# Altium PCB PCB1.PcbDoc
Units mm, origin at the board's own origin, x right, y up, seen from the top; angles counter-clockwise.
Board outline 152.4 x 101.6 mm, 2 copper layers (Top Layer, Bottom Layer); 104 components, 87 nets, 414 pads, 25 vias.
Unrouted connection lines stored in the file: 283.
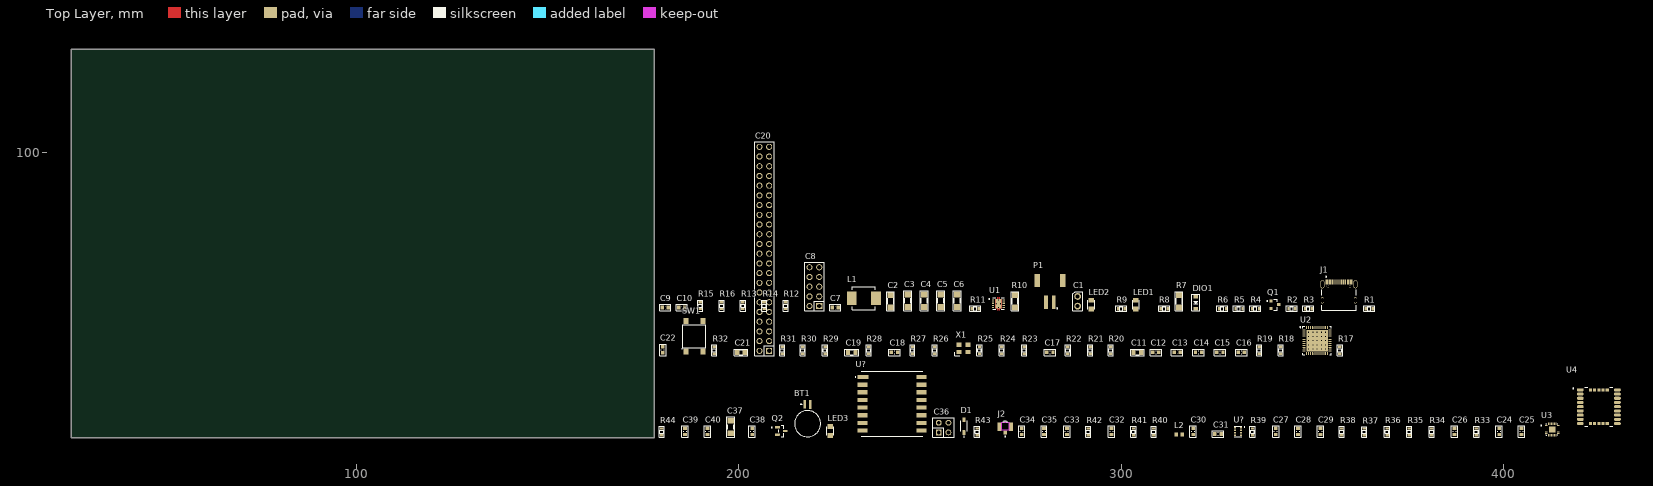
[diagram p0: Top Layer view]
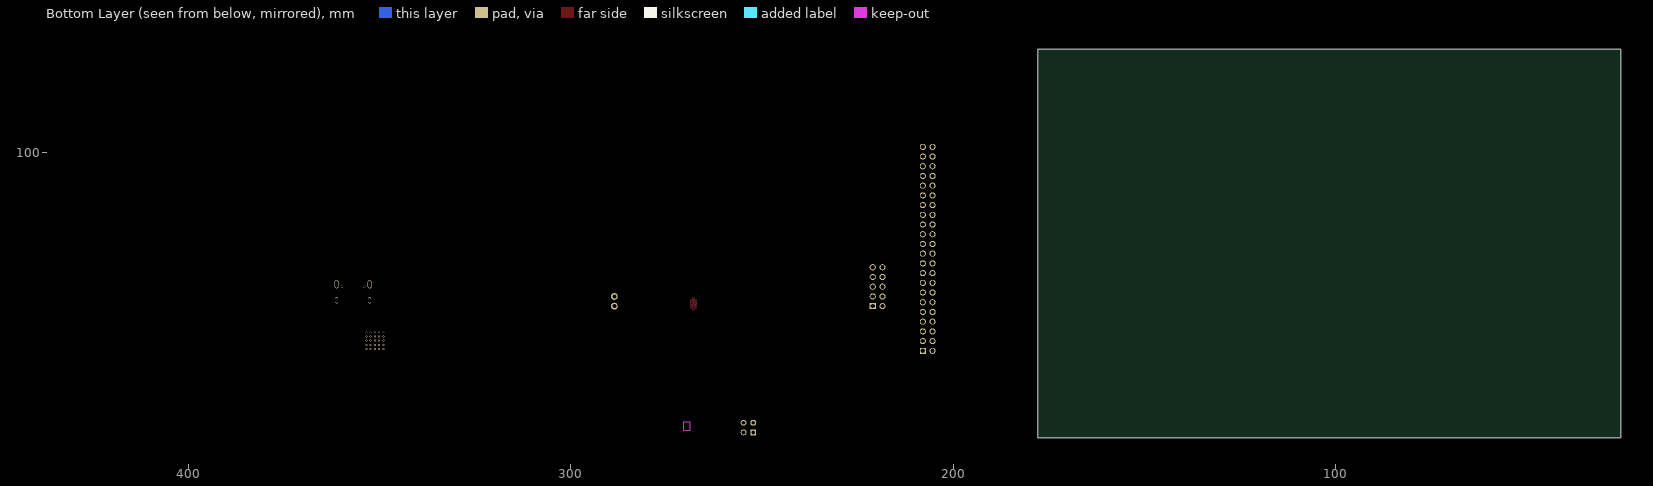
[diagram p1: Bottom Layer view, seen from below]

## Layer stack, top to bottom
Top Solder: solder mask 0.0102, Solder Resist, Dk 3.5
Top Layer: signal copper 0.0356
Dielectric 1: dielectric 0.32, FR-4, Dk 4.8
Bottom Layer: signal copper 0.0356
Bottom Solder: solder mask 0.0102, Solder Resist, Dk 3.5

## Board outline
25.4,25.4 177.8,25.4 177.8,127 25.4,127

## Design rules (kind name [scope] priority, off if disabled: settings)
Clearance [All] p1: gap=0.254 ignorepadtopadclearanceinfootprint=FALSE
PolygonConnect [All] p1: connectstyle=Relief reliefconductorwidth=0.254 reliefentries=4 polygonreliefangle="90 Angle" airgapwidth=0.254
RoutingVias [All] p1: holewidth=0.711 width=1.27 viastyle="Through Hole" minholewidth=0.711 minwidth=1.27 maxholewidth=0.711 maxwidth=1.27
SolderMaskExpansion [All] p1: expansion=0 istentingtop=FALSE
SupplyNets "Schematic Supply Nets_5" [InNet('VBUS')] p1: voltage=0.000
SupplyNets "Schematic Supply Nets_4" [InNet('GND_OUT')] p2: voltage=0.000
SupplyNets "Schematic Supply Nets_3" [InNet('GPS_VBAT')] p3: voltage=0.000
SupplyNets "Schematic Supply Nets_2" [InNet('VBAT')] p4: voltage=0.000
SupplyNets "Schematic Supply Nets_1" [InNet('V_PWR')] p5: voltage=0.000
SupplyNets "Schematic Supply Nets" [InNet('3.3V_OUT')] p6: voltage=0.000
Width [All] p1: maxlimit=0.254 minlimit=0.254 preferedwidth=0.254
30 further rules are at their usual default settings.

## Components (designator, comment, footprint, x,y, rotation, side; value= is the part's Value field where it differs from the comment)
BT1 "MS621FE-FL11E" BAT_MS621FE-FL11E 217.932,29.083 r90 top
C1 "JP2" JP2-CLOSED 288.544,62.357 r0 top
C2 "Pad" PAD-SMD-1206 239.649,61.087 r90 top value=33pF
C3 "100uF" CN-SMD-1206 244.094,61.214 r90 top value=33pF
C4 "10uF" CN-SMD-1206 248.412,61.214 r90 top value=33pF
C5 "10uF" CN-SMD-1206 252.73,61.214 r90 top value=33pF
C6 "10uF" CN-SMD-1206 257.048,61.214 r90 top value=33pF
C7 "100nF" CN-SMD-0603 225.171,59.436 r0 top value=33pF
C8 "JP5x2" JP5-D2T 219.71,64.897 r90 top
C9 "100nF" CN-SMD-0603 180.721,59.436 r0 top value=33pF
C10 "100nF" CN-SMD-0603 185.039,59.436 r0 top value=33pF
C11 "2.2uF" CN-SMD-0805 304.165,47.752 r0 top value=33pF
C12 "100nF" CN-SMD-0603 308.991,47.752 r0 top value=33pF
C13 "100nF" CN-SMD-0603 314.579,47.752 r0 top value=33pF
C14 "100nF" CN-SMD-0603 320.167,47.752 r0 top value=33pF
C15 "100nF" CN-SMD-0603 325.755,47.752 r0 top value=33pF
C16 "100nF" CN-SMD-0603 331.343,47.752 r0 top value=33pF
C17 "15pF" CN-SMD-0603 281.305,47.752 r0 top value=33pF
C18 "15pF" CN-SMD-0603 240.665,47.752 r0 top value=33pF
C19 "2.2uF" CN-SMD-0805 229.489,47.752 r0 top value=33pF
C20 "JP22x2" JP22-D2T 206.629,74.803 r90 top
C21 "2.2uF" CN-SMD-0805 200.533,47.752 r0 top value=33pF
C22 "100nF" CN-SMD-0603 180.086,48.387 r90 top value=33pF
C24 "100nF" CN-SMD-0603 398.78,27.051 r90 top value=33pF
C25 "33nF" CN-SMD-0603 404.622,27.051 r90 top value=33pF
C26 "100nF" CN-SMD-0603 387.096,27.051 r90 top value=33pF
C27 "100nF" CN-SMD-0603 340.36,27.051 r90 top value=33pF
C28 "10nF" CN-SMD-0603 346.202,27.051 r90 top value=33pF
C29 "10nF" CN-SMD-0603 352.044,27.051 r90 top value=33pF
C30 "100pF" CN-SMD-0603 318.77,27.051 r90 top value=33pF
C31 "10nF" CN-SMD-0603 325.247,26.416 r0 top value=33pF
C32 "100pF" CN-SMD-0603 297.434,27.051 r90 top value=33pF
C33 "100nF" CN-SMD-0603 285.75,27.051 r90 top value=33pF
C34 "PAD" PAD-CAP-SMD-0603 273.939,27.051 r90 top value=33pF
C35 "PAD" PAD-CAP-SMD-0603 279.781,27.051 r90 top value=33pF
C36 "JP2x2" JP2-C2T 253.492,28.067 r0 top
C37 "22uF" CN-SMD-1206 197.866,28.194 r90 top value=33pF
C38 "100nF" CN-SMD-0603 203.454,27.051 r90 top value=33pF
C39 "100nF" CN-SMD-0603 185.928,27.051 r90 top value=33pF
C40 "33nF" CN-SMD-0603 191.77,27.051 r90 top value=33pF
D1 "1N4148W-7" SOD3715X135N 258.826,28.448 r90 top
DIO1 "Diode SMD" DIO-SMD-123 319.405,60.706 r90 top value=1N5007
J1 "CQ-USB-C16PSMT01" SHENZHEN-CHUANGQIN-TECHNOLOGY_CQ-USB-C16PSMT01 356.87,66.167 r0 top
J2 "IPEX" IPEX_20279-001E-03 269.621,28.321 r0 top
L1 "2.2uH" INDC6060X300 232.664,61.849 r0 top
L2 "68nH" SMD_Inductor_0603 315.087,26.289 r0 top
LED1 "LED GREEN" LED-0805-Green 303.784,59.055 r90 top value="LED 3 - 5 ly 2 Colour"
LED2 "LED GREEN" LED-0805-Blue 292.1,59.055 r90 top value="LED 3 - 5 ly 2 Colour"
LED3 "LED" LED-0805-Green 223.901,26.035 r90 top value="LED 3 - 5 ly 2 Colour"
P1 "S2B-PH-SM4-TB" JST_S2B-PH-SM4-TB 281.305,60.833 r0 top
Q1 "P_MOSFET" P_MOSFET_SOT23 340.106,60.198 r0 top
Q2 "N_MOSFET" SOT-23-3 211.074,27.178 r0 top
R1 "5.1K" RES-SMD-0603 364.744,59.182 r0 top
R2 "5.1K" RES-SMD-0603 344.551,59.182 r0 top
R3 "22R" RES-SMD-0603 348.869,59.182 r0 top
R4 "10K" RES-SMD-0603 335.026,59.182 r0 top
R5 "22R" RES-SMD-0603 330.708,59.182 r0 top
R6 "22R" RES-SMD-0603 326.39,59.182 r0 top
R7 "Pad" PAD-SMD-1206 315.087,61.087 r90 top
R8 "1.5K" RES-SMD-0603 311.15,59.182 r0 top
R9 "2K" RES-SMD-0603 299.974,59.182 r0 top
R10 "Pad" PAD-SMD-1206 272.161,61.087 r90 top
R11 "100R" RES-SMD-0603 261.747,59.182 r0 top
R12 "5.1K" RES-SMD-0603 212.217,59.944 r90 top
R13 "80K" RES-SMD-0603 201.041,59.944 r90 top
R14 "66K" RES-SMD-0603 206.629,59.944 r90 top
R15 "200K" RES-SMD-0603 189.865,59.944 r90 top
R16 "200K" RES-SMD-0603 195.453,59.944 r90 top
R17 "0R" RES-SMD-0603 357.124,48.26 r90 top
R18 "0R" RES-SMD-0603 341.63,48.26 r90 top
R19 "0R" RES-SMD-0603 336.042,48.26 r90 top
R20 "0R" RES-SMD-0603 297.18,48.26 r90 top
R21 "0R" RES-SMD-0603 291.846,48.26 r90 top
R22 "0R" RES-SMD-0603 286.004,48.26 r90 top
R23 "0R" RES-SMD-0603 274.574,48.26 r90 top
R24 "10K" RES-SMD-0603 268.732,48.26 r90 top
R25 "0R" RES-SMD-0603 262.89,48.26 r90 top
R26 "0R" RES-SMD-0603 251.206,48.26 r90 top
R27 "PAD" PAD-RES-SMD-0603 245.364,48.26 r90 top
R28 "10K" RES-SMD-0603 233.934,48.26 r90 top
R29 "0R" RES-SMD-0603 222.504,48.26 r90 top
R30 "PAD" PAD-RES-SMD-0603 216.662,48.26 r90 top
R31 "PAD" PAD-RES-SMD-0603 211.328,48.26 r90 top
R32 "10K" RES-SMD-0603 193.548,48.26 r90 top
R33 "10K" RES-SMD-0603 392.811,26.924 r90 top
R34 "10K" RES-SMD-0603 381.127,26.924 r90 top
R35 "10K" RES-SMD-0603 375.285,26.924 r90 top
R36 "4.7K" RES-SMD-0603 369.443,26.924 r90 top
R37 "PAD" PAD-RES-SMD-0603 363.474,26.924 r90 top
R38 "4.7K" RES-SMD-0603 357.632,26.924 r90 top
R39 "10K" RES-SMD-0603 334.264,26.924 r90 top
R40 "10R" RES-SMD-0603 308.483,26.924 r90 top
R41 "10K" RES-SMD-0603 303.149,26.924 r90 top
R42 "0R" RES-SMD-0603 291.338,26.924 r90 top
R43 "1K" RES-SMD-0603 262.255,26.924 r90 top
R44 "1K" RES-SMD-0603 179.832,26.924 r90 top
SW1 "SW" SW2-SMD 188.341,51.943 r90 top value="Button chip 4 pin"
U1 "TPS63001DRCR" VREG_V62/16624-01YE 267.843,60.452 r0 top
U2 "STM32F411CEU6" STM-UFQFPN48_L 351.155,50.8 r0 top
U3 "MPU-9250" QFN40P300X300X105-25N 412.623,27.559 r0 top
U4 "LC76G" XCVR_LC76G 424.815,33.528 r0 top
U? "RA-02_LORA" MODULE_RA-02_LORA 240.03,34.29 r0 top
U? "BMP280" XDCR_BMP280 330.454,27.051 r0 top
X1 "XTAL_3225_25MHZ" XTAL_3225 258.699,48.768 r0 top

## Footprints (in the part's own frame and the unit in brackets; to place one, negate y for a bottom-side part, rotate by r counter-clockwise, add the part's x,y. Pads: shape width x height; smd on the part's side, far side on the other; paste and mask are expansions set on the pad)
BAT_MS621FE-FL11E [mm]
  rect 2.3x0.65 smd: NEG(5,-0.75)
  rect 2.2x0.65 smd: POS(5.05,0.75)
  silkscreen extent -3.4,-3.4 5.3,3.4, body extent -3.4,-3.4 5.9,3.4, height 2.8
CN-SMD-0603 [mm]
  rect 0.9x1 smd: 1(-0.8,0) 2(0.8,0)
  silkscreen extent -1.5,-0.85 1.5,0.85, body extent -0.8,-0.4 0.8,0.4, height 0.3
CN-SMD-0805 [mm]
  rect 1.1x1.397 smd: 1(-1,0) 2(1,0)
  silkscreen extent -1.78,-0.86 1.78,0.84, body extent -1,-0.62 1,0.63, height 0.8
CN-SMD-1206 [mil]
  rect 60x65 smd: 1(-64,0) 2(66,0)
  silkscreen extent -103,-42 105,42, body extent -63,-31 63,32, height 40
DIO-SMD-123 [mm]
  rect 0.9x1.2 smd: 1(1.524,0) 2(-1.524,0)
  silkscreen extent -2.16,-1.02 2.16,1.02, body extent -1.76,-0.8 1.94,0.8, height 1.25
INDC6060X300 [mm]
  rect 2.6x3.5 smd: 1(-3.175,0) 2(3.175,0)
  silkscreen extent -3,-3 3,3, body extent -3.55,-3 3.55,3, height 3
IPEX_20279-001E-03 [mm]
  rect 1x1.05 smd: 1(0,-1.525)
  rect 1.05x2.2 smd: 2(1.475,0) 3(-1.475,0)
  Keep-Out Layer region: 0.95,-1 -0.95,-1 -0.95,1.1 0.95,1.1
  silkscreen extent -0.7,-2.71 0.7,1.55, body extent -1.5,-1.55 1.5,1.55, height 1.25
JP2-C2T [mm] "4 pins, dual row, straight, gold plating"
  rect 1.52x1.52 hole 1.02: 1(-1.27,-1.27)
  round 1.52 hole 1.02: 2(1.27,-1.27) 3(1.27,1.27) 4(-1.27,1.27)
  silkscreen extent -2.79,-2.54 2.79,2.54, body extent -2.79,-2.54 2.79,2.54, height 8.51
JP2-CLOSED [mil]
  round 70 hole 40: 1(0,0) 2(0,-100)
  silkscreen extent -50,-150 50,50, body extent -50,-152 50,50, height 300
JP5-D2T [mm] "10 pins, dual pin, straight, gold plating"
  rect 1.6x1.6 hole 1.1: 1(-5.08,-1.27)
  round 1.6 hole 1.1: 2(-2.54,-1.27) 3(0,-1.27) 4(2.54,-1.27) 5(5.08,-1.27) 6(5.08,1.27) 7(2.54,1.27) 8(0,1.27) 9(-2.54,1.27) 10(-5.08,1.27)
  silkscreen extent -6.35,-2.54 6.35,2.54, body extent -6.35,-2.54 6.35,2.54, height 8.55
JP22-D2T [mm] "44 pins, dual pin, straight, gold plating"
  rect 1.6x1.6 hole 1.1: 1(-26.67,-1.27)
  round 1.6 hole 1.1: 2(-24.13,-1.27) 3(-21.59,-1.27) 4(-19.05,-1.27) 5(-16.51,-1.27) 6(-13.97,-1.27) 7(-11.43,-1.27) 8(-8.89,-1.27) 9(-6.35,-1.27) 10(-3.81,-1.27) 11(-1.27,-1.27) 12(1.27,-1.27) 13(3.81,-1.27) 14(6.35,-1.27) 15(8.89,-1.27) 16(11.43,-1.27) 17(13.97,-1.27) 18(16.51,-1.27) 19(19.05,-1.27) 20(21.59,-1.27) 21(24.13,-1.27) 22(26.67,-1.27) 23(26.67,1.27) 24(24.13,1.27) 25(21.59,1.27) 26(19.05,1.27) 27(16.51,1.27) 28(13.97,1.27) 29(11.43,1.27) 30(8.89,1.27) 31(6.35,1.27) 32(3.81,1.27) 33(1.27,1.27) 34(-1.27,1.27) 35(-3.81,1.27) 36(-6.35,1.27) 37(-8.89,1.27) 38(-11.43,1.27) 39(-13.97,1.27) 40(-16.51,1.27) 41(-19.05,1.27) 42(-21.59,1.27) 43(-24.13,1.27) 44(-26.67,1.27)
  silkscreen extent -27.94,-2.54 27.94,2.54, body extent -27.94,-2.54 27.94,2.54, height 8.55
JST_S2B-PH-SM4-TB [mm]
  rect 1x3.5 smd: 1(1,0) 2(-1,0)
  rect 1.5x3.4 smd: P1(3.35,5.75) P2(-3.35,5.75)
  silkscreen extent 1.77,-1.73 2.03,-1.47, body extent -3.96,-1.38 3.94,7.22, height 5.5
LED-0805-Blue [mil]
  rect 50x55 smd: 1(0,0) 2(90,0)
  silkscreen extent 0,-35 90,35, body extent 5,-25 85,25, height 43
LED-0805-Green [mil]
  rect 50x55 smd: 1(0,0) 2(90,0)
  silkscreen extent 0,-35 90,35, body extent 5,-25 85,25, height 43
MODULE_RA-02_LORA [mm]
  rect 2.8x1.1 smd: 1(-7.6,7)
  rect 2.6x1.1 smd: 2(-7.7,5) 3(-7.7,3) 4(-7.7,1) 5(-7.7,-1) 6(-7.7,-3) 7(-7.7,-5) 8(-7.7,-7) 9(7.7,-7) 10(7.7,-5) 11(7.7,-3) 12(7.7,-1) 13(7.7,1) 14(7.7,3) 15(7.7,5) 16(7.7,7)
  silkscreen extent -9.68,-8.5 8,8.5, body extent -8,-8.5 8,8.5, height 3.3
P_MOSFET_SOT23 [mm]
  rect 0.9x0.8 smd: 1(-1,0.95) 2(-1,-0.95) 3(1,0)
  silkscreen extent -2.1,-1.45 0.65,1.45, body extent -1.2,-1.45 1.2,1.45, height 1.2
PAD-CAP-SMD-0603 [mm]
  rect 0.9x1 smd: 1(-0.8,0) 2(0.8,0)
  silkscreen extent -1.5,-0.75 1.5,0.75
PAD-RES-SMD-0603 [mm]
  rect 0.6x0.9 smd: 1(-0.889,0) 2(0.927,0)
  silkscreen extent -1.4,-0.64 1.4,0.64
PAD-SMD-1206 [mil]
  rect 60x65 smd: 1(-64,0) 2(66,0)
  silkscreen extent -98,-38 100,39
QFN40P300X300X105-25N [mm]
  rrect25% 0.64x0.22 smd: 1(-1.545,1) 2(-1.545,0.6) 3(-1.545,0.2) 4(-1.545,-0.2) 5(-1.545,-0.6) 6(-1.545,-1) 13(1.545,-1) 14(1.545,-0.6) 15(1.545,-0.2) 16(1.545,0.2) 17(1.545,0.6) 18(1.545,1)
  rrect25% 0.22x0.64 smd: 7(-1,-1.545) 8(-0.6,-1.545) 9(-0.2,-1.545) 10(0.2,-1.545) 11(0.6,-1.545) 12(1,-1.545) 19(1,1.545) 20(0.6,1.545) 21(0.2,1.545) 22(-0.2,1.545) 23(-0.6,1.545) 24(-1,1.545)
  rect 1.7x1.54 smd paste-2: 25(0,0)
  silkscreen extent -2.96,-1.5 1.5,1.5, body extent -1.5,-1.5 1.5,1.5, height 1.05
RES-SMD-0603 [mm]
  rect 0.6x0.9 smd: 1(-0.889,0) 2(0.927,0)
  silkscreen extent -1.43,-0.68 1.45,0.67, body extent -0.8,-0.4 0.8,0.4, height 0.43
SHENZHEN-CHUANGQIN-TECHNOLOGY_CQ-USB-C16PSMT01 [mm]
  rect 0.6x1.3 smd: A1_B12(-3.2,0) A4_B9(-2.4,0) B1_A12(3.2,0) B4_A9(2.4,0)
  rect 0.3x1.3 smd: A5(-1.25,0) A6(-0.25,0) A7(0.25,0) A8(1.25,0) B5(1.75,0) B6(0.75,0) B7(-0.75,0) B8(-1.75,0)
  oval 1.05x2.1 hole 0.6 slot 1.7 at 90 deg: S1(-4.32,-0.64) S2(4.32,-0.64)
  oval 0.8x1.6 hole 0.6 slot 1.2 at 90 deg: S3(-4.32,-4.82) S4(4.32,-4.82)
  round 0.65 hole 0.65 unplated: ""(-2.89,-1.14) ""(2.89,-1.14)
  silkscreen extent -4.47,-7.42 4.47,1.45, body extent -4.47,-7.33 4.47,0.48, height 3.26
SMD_Inductor_0603 [mm]
  rect 0.94x1.11 smd: 1(-0.789,0) 2(0.789,0)
  body extent -0.8,-0.4 0.8,0.4, height 1
SOD3715X135N [mm]
  rrect18% 1.21x0.73 smd: A(1.68,0) C(-1.68,0)
  silkscreen extent -2.9,-0.85 1.35,0.85, body extent -1.83,-0.77 1.83,0.77, height 0.74
SOT-23-3 [mm]
  rrect25% 1.3x0.6 smd: 1(-1.025,0.95) 2(-1.025,-0.95) 3(1.025,0)
  silkscreen extent -2.6,-1.46 0.65,1.46, body extent -1.18,-1.46 1.18,1.46, height 1.12
STM-UFQFPN48_L [mm] "QFN, 48-Leads, Body 7.1x7.1mm, Pitch 0.5mm, Thermal Pad 5.6x5.6mm, IPC High Density"
  oval 0.8x0.25 smd: 1(-3.4,2.75) 2(-3.4,2.25) 3(-3.4,1.75) 4(-3.4,1.25) 5(-3.4,0.75) 6(-3.4,0.25) 7(-3.4,-0.25) 8(-3.4,-0.75) 9(-3.4,-1.25) 10(-3.4,-1.75) 11(-3.4,-2.25) 12(-3.4,-2.75) 25(3.4,-2.75) 26(3.4,-2.25) 27(3.4,-1.75) 28(3.4,-1.25) 29(3.4,-0.75) 30(3.4,-0.25) 31(3.4,0.25) 32(3.4,0.75) 33(3.4,1.25) 34(3.4,1.75) 35(3.4,2.25) 36(3.4,2.75)
  oval 0.25x0.8 smd: 13(-2.75,-3.4) 14(-2.25,-3.4) 15(-1.75,-3.4) 16(-1.25,-3.4) 17(-0.75,-3.4) 18(-0.25,-3.4) 19(0.25,-3.4) 20(0.75,-3.4) 21(1.25,-3.4) 22(1.75,-3.4) 23(2.25,-3.4) 24(2.75,-3.4) 37(2.75,3.4) 38(2.25,3.4) 39(1.75,3.4) 40(1.25,3.4) 41(0.75,3.4) 42(0.25,3.4) 43(-0.25,3.4) 44(-0.75,3.4) 45(-1.25,3.4) 46(-1.75,3.4) 47(-2.25,3.4) 48(-2.75,3.4)
  rect 5.6x5.6 smd: 49(0,0)
  silkscreen extent -4.47,-3.7 3.7,3.7, body extent -3.55,-3.55 3.55,3.55, height 0.6
SW2-SMD [mm] "6*6mm vertical type, SMD, height 5.0mm, black actuator, 160gf, T&R"
  rect 1.55x1.3 smd: 1(-3.975,2.25) 2(-3.975,-2.25) 3(3.975,-2.25) 4(3.975,2.25)
  silkscreen extent -3.29,-3.04 3.04,3.29, body extent -4.5,-3.1 4.5,3.1, height 4.99
VREG_V62/16624-01YE [mm]
  rrect25% 0.6x0.24 smd mask+0: 1(-1.4,1) 2(-1.4,0.5) 3(-1.4,0) 4(-1.4,-0.5) 5(-1.4,-1) 6(1.4,-1) 7(1.4,-0.5) 8(1.4,0) 9(1.4,0.5) 10(1.4,1)
  rrect5% 1.65x2.4 smd paste-2 mask+0: 11(0,0)
  round 0.3 hole 0.2 mask+0: 12(0,-0.95) 13(-0.575,0) 14(0.575,0) 15(0,0.95)
  Top Layer region: 0.375,1.2 0.825,1.2 0.825,-1.2 0.375,-1.2 0.375,-1.7 0.125,-1.7 0.125,-1.2 -0.125,-1.2 -0.125,-1.7 -0.375,-1.7 -0.375,-1.2 -0.825,-1.2 -0.825,1.2 -0.375,1.2 -0.375,1.7 -0.125,1.7 -0.125,1.2 0.125,1.2 0.125,1.7 0.375,1.7
  silkscreen extent -2.49,-1.5 1.5,1.5, body extent -1.5,-1.5 1.5,1.5, height 1
XCVR_LC76G [mm]
  oval 1.8x0.8 smd: 1(-4.85,4.4) 2(-4.85,3.3) 3(-4.85,2.2) 4(-4.85,1.1) 5(-4.85,0) 6(-4.85,-1.1) 7(-4.85,-2.2) 8(-4.85,-3.3) 9(-4.85,-4.4) 10(4.85,-4.4) 11(4.85,-3.3) 12(4.85,-2.2) 13(4.85,-1.1) 14(4.85,0) 15(4.85,1.1) 16(4.85,2.2) 17(4.85,3.3) 18(4.85,4.4)
  rect 0.8x0.8 smd: 19(2.2,4.4) 20(1.1,4.4) 21(0,4.4) 22(-1.1,4.4) 23(-2.2,4.4) 24(-2.2,-4.4) 25(-1.1,-4.4) 26(0,-4.4) 27(1.1,-4.4) 28(2.2,-4.4)
  silkscreen extent -6.8,-5.05 3.63,5.05, body extent -4.85,-5.05 4.85,5.05, height 2.65
XDCR_BMP280 [mm]
  rect 0.5x0.35 smd: 1(0.8,0.975) 2(0.8,0.325) 3(0.8,-0.325) 4(0.8,-0.975) 5(-0.8,-0.975) 6(-0.8,-0.325) 7(-0.8,0.325) 8(-0.8,0.975)
  silkscreen extent -1,-1.35 1.8,1.35, body extent -1,-1.25 1,1.25, height 1
XTAL_3225 [mm]
  rrect10% 1.3x1.1 smd: 1(-1.15,-0.95) 2(1.15,-0.95) 3(1.15,0.95) 4(-1.15,0.95)
  silkscreen extent -2.23,-1.89 -1,-1, body extent -1.6,-1.28 1.6,1.22, height 0.61

## Part data
BT1: "Coin, 6.8mm 3 V Lithium Battery Rechargeable (Secondary) 5.5mAh", Package="QFP-128 Seiko", Availability="In Stock", Check_prices=https://www.snapeda.com/parts/MS621FE-FL11E/Seiko+Instruments/view-part/?ref=eda, MF="Seiko Instruments", MP=MS621FE-FL11E, Price=None, Purchase-URL=https://pricing.snapeda.com/search/part/MS621FE-FL11E/?ref=eda, SnapEDA_Link=https://www.snapeda.com/parts/MS621FE-FL11E/Seiko+Instruments/view-part/?ref=snap
C1: "WR-PHD 2.54 mm Angled Socket Header", Manufacturer="W¨¹rth Elektronik eiSos GmbH", partNo=613002143121, ComponentLink1 Description=Manufacturer, ComponentLink1URL=http://www.we-online.com, ComponentLink2 Description=Datasheet, ComponentLink2URL=http://katalog.we-online.de/em/datasheet/6130xx143121.pdf, Created by="Karrer Zheng", Created Date="29 March 2013", NoPins=02
C2 C3 C4 C5 C6 C7 C9 C10 C11 C12 C13 C14 C15 C16 C17 C18 C19 C21 C22 C24 C25 C26 C27 C28 C29 C30 C31 C32 C33 C34 C35 C37 C38 C39 C40: library part Cap-SMD
C8: "WR-PHD 2.54 mm Dual Socket Header", Manufacturer="W¨¹rth Elektronik eiSos GmbH", partNo=61301021821, ComponentLink1 Description=Manufacturer, ComponentLink1URL=http://www.we-online.com, ComponentLink2 Description=Datasheet, ComponentLink2URL=http://katalog.we-online.de/em/datasheet/6130xx21821.pdf, Created by="Karrer Zheng", Created Date="29 March 2013", NoPins=10
C20: "WR-PHD 2.54 mm Dual Socket Header", Manufacturer="W¨¹rth Elektronik eiSos GmbH", partNo=61304421821, ComponentLink1 Description=Manufacturer, ComponentLink1URL=http://www.we-online.com, ComponentLink2 Description=Datasheet, ComponentLink2URL=http://katalog.we-online.de/em/datasheet/6130xx21821.pdf, Created by="Karrer Zheng", Created Date="29 March 2013", NoPins=44
C36: "WR-PHD 2.54 mm Dual Socket Header", Manufacturer="W¨¹rth Elektronik eiSos GmbH", partNo=61300421821, ComponentLink1 Description=Manufacturer, ComponentLink1URL=http://www.we-online.com, ComponentLink2 Description=Datasheet, ComponentLink2URL=http://katalog.we-online.de/em/datasheet/6130xx21821.pdf, Created by="Karrer Zheng", Created Date="29 March 2013", NoPins=04
D1: "Diode Standard 100 V 300mA (DC) Surface Mount SOD-123", Package="SOD-123 Fairchild Semiconductor", Availability="In Stock", Check_prices=https://www.snapeda.com/parts/1N4148W-7/Diodes+Inc./view-part/?ref=eda, MF="Diodes Inc.", MP=1N4148W-7, Price=None, Purchase-URL=https://pricing.snapeda.com/search/part/1N4148W-7/?ref=eda, SnapEDA_Link=https://www.snapeda.com/parts/1N4148W-7/Diodes+Inc./view-part/?ref=snap
DIO1: "Default Diode", Code - JEDEC=DO-214-AB, Published=8-Jun-2000, Publisher="Altium Limited", Revision="July-2002: Re-released for DXP Platform."
J1: "C Type USB Type-C Female Plug 16 Pin Connector Power Charger Jack Port", Package=Package, Check_prices=https://www.snapeda.com/parts/CQ-USB-C16PSMT01/Shenzen+Chuangqin+Technology/view-part/?ref=eda, MF="Shenzen Chuangqin Technology", MP=CQ-USB-C16PSMT01, SnapEDA_Link=https://www.snapeda.com/parts/CQ-USB-C16PSMT01/Shenzen+Chuangqin+Technology/view-part/?ref=snap
J2: "1 POS Vertical SMD Small form factor with big performance through 6 GHz connector,MHF, RF, micro-coaxial MHF I Receptacle", Package=None, Check_prices=https://www.snapeda.com/parts/20279-001E-03/I-PEX/view-part/?ref=eda, MF=I-PEX, MP=20279-001E-03, SnapEDA_Link=https://www.snapeda.com/parts/20279-001E-03/I-PEX/view-part/?ref=snap
L1 L2: library part SMD-Wire-Inductor, "INDUCTOR wire-wound", Package=None, Availability=Unavailable, MP=LQW2BAN68NG00L, Price=None
LED1 LED2 LED3: library part "LED SMD"
P1: "Connector Header Surface Mount, Right Angle 2 position 0.079 (2.00mm)", Package=None, Check_prices=https://www.snapeda.com/parts/S2B-PH-SM4-TB/JST/view-part/?ref=eda, MF="JST Sales", MP=S2B-PH-SM4-TB, SnapEDA_Link=https://www.snapeda.com/parts/S2B-PH-SM4-TB/JST/view-part/?ref=snap
Q1: Package="SOT-23 Diotec", Check_prices=https://www.snapeda.com/parts/MMFTP3401/Diotec/view-part/?ref=eda, MF="Diotec Semiconductor", MP=MMFTP3401, SnapEDA_Link=https://www.snapeda.com/parts/MMFTP3401/Diotec/view-part/?ref=snap
Q2: Package="SOT-23-3 Vishay Siliconix", Check_prices=https://www.snapeda.com/parts/SI2306BDS-T1-GE3/Vishay/view-part/?ref=eda, MF="Vishay Siliconix", MP=SI2306BDS-T1-GE3, SnapEDA_Link=https://www.snapeda.com/parts/SI2306BDS-T1-GE3/Vishay/view-part/?ref=snap
R1 R2 R3 R4 R5 R6 R7 R8 R9 R10 R11 R12 R13 R14 R15 R16 R17 R18 R19 R20 R21 R22 R23 R24 R25 R26 R27 R28 R29 R30 R31 R32 R37 R40 R42 R43 R44: library part Res-SMD, "Resistor", Manufacturer="Generic Components", Class=Passive, Published=08/06/2000, Publisher="Altium Hobart Technology Centre"
R33 R34 R35 R36 R38 R39 R41: library part Res-SMD, Manufacturer="Generic Components", Class=Passive, Published=08/06/2000, Publisher="Altium Hobart Technology Centre"
SW1: library part SW4, "Switch button 4 pin"
U1: "96% Buck-Boost Converter with 1.7A Current Switches, 3.3V fixed Output voltage in 3x3 QFN", Package="VSON-10 Texas Instruments", Check_prices=https://www.snapeda.com/parts/TPS63001DRCR/Texas+Instruments/view-part/?ref=eda, MF="Texas Instruments", MP=TPS63001DRCR, SnapEDA_Link=https://www.snapeda.com/parts/TPS63001DRCR/Texas+Instruments/view-part/?ref=snap
U2: library part CMP-0243-00165-1, "ARM Cortex-M4 32-bit MCU+FPU, 512 KB Flash, 128 KB RAM, 36 I/Os, 48-Pin UFQFPN, -40 to 85 degC, Tray", I/Os (High Current)=36, Operating Frequency(F) (Processor speed) (MHz)=100, Package Description=UFQFPN48, Package Reference="48-Pin Ultra Thin Fine Pitch Quad Flat No-Lead, 7 x 7 x 0.6 mm Body, 0.5 mm Pitch, Exposed Pad", Supply Voltage(Vcc) min (V)=1.7, ComponentLink1Description="Manufacturer URL", ComponentLink1URL=http://www.st.com/, ComponentLink2Description=Datasheet, ComponentLink2URL=http://www.st.com/st-web-ui/static/active/en/resource/technical/document/datasheet/DM00115249.pdf, Core="ARM Cortex-M4", DatasheetVersion="Rev. 6", FLASH Size (Prog) (kB)=512, Internal RAM Size (kB)=128, Mounting Technology="Surface Mount", Packing=Tray
U3: "MPU-9250 series Accelerometer, Gyroscope, Humidity, Magnetometer, Pressure, Temperature Sensor Evaluation Board", Package="TFQFN-24 TDK InvenSense", Check_prices=https://www.snapeda.com/parts/MPU-9250/TDK+InvenSense/view-part/?ref=eda, MF="TDK InvenSense", MP=MPU-9250, SnapEDA_Link=https://www.snapeda.com/parts/MPU-9250/TDK+InvenSense/view-part/?ref=snap
U4: Package=None, Availability=Unavailable, MF=Quectel, MP=LC76G, Price=None
U?: "Ra-02 LoRa RF M5Stack Platform Evaluation Expansion Board", Package=None, Availability=Unavailable, MP=RA-02_LORA, Price=None
U?: "BMP280 Absolute Barometric Pressure Sensor for Battery Powered Devices 2 x 2.5mm", Package=None, Availability=Unavailable, MP=BMP280, Price=None
X1: library part "XTAL 4 Pin", "Crystal Oscillator"

## Via types
v1: diameter 0.5, hole 0.2, Top Layer to Bottom Layer, 25 vias

## Nets (pads, with @x,y where several pads share a name; then routed paths per layer and width w, separated by ;. In a path a pad name is that pad's centre, name@x,y a point inside that pad or via, vN(x,y) a via of type N, cw(c..) or ccw(c..) an arc to the next point about the centre after c; other vN are vias at no path point)
3.3V_OUT: C5.2 C6.2 C8.7 C11.2 C12.2 C13.2 C14.2 C15.2 C16.2 C20.1 C20.5 C20.15 C20.28 C20.40 C20.44 C21.2 C24.2 C25.2 C27.2 C28.2 C29.2 C33.2 C37.2 C38.2 D1.A R8.2 R32.1 R35.1 R36.1 R37.2 R38.1 R39.2 R41.2 R43.2 U1.1 U1.10 U2.1 U2.9 U2.24 U2.36 U2.48 U3.1 U3.8 U3.13 U4.8 U?.3@232.33,37.29 U?.6@329.654,26.726 U?.8@329.654,28.026
ADC1: R29.1 U2.11
CC1: J1.A5 R1.2
CC2: J1.B5 R2.2
DN: C8.3 J1.A7 J1.B7 R6.2
DP: C8.2 J1.A6 J1.B6 R5.2
GND_OUT: BT1.NEG C2.1 C3.1 C4.1 C5.1 C6.1 C7.1 C8.5 C8.6 C9.1 C10.1 C11.1 C12.1 C13.1 C14.1 C15.1 C16.1 C17.2 C18.2 C19.1 C20.2 C20.6 C20.22 C20.23 C20.24 C20.25 C20.29 C20.32 C20.39 C20.43 C21.1 C22.1 C24.1 C25.1 C26.2 C27.1 C28.1 C29.1 C30.2 C31.2 C33.1 C34.2 C35.2 C36.2 C37.1 C38.1 C39.1 C40.1 J1.A1_B12 J1.B1_A12 J1.S1 J1.S2 J1.S3 J1.S4 J2.2 J2.3 LED1.2 LED2.2 P1.1 Q2.2 R1.1 R2.1 R4.2 R12.2 R15.1 R16.1 R24.2 R33.2 R34.2 SW1.2 SW1.3 U1.3 U1.9 U1.11 U2.8 U2.23 U2.35 U2.47 U2.49 U3.18 U3.20 U3.25 U4.1 U4.10 U4.12 U?.1 U?.2@232.33,39.29 U?.7@329.654,27.376 U?.9 U?.16 X1.2 X1.4
  other v1: 348.955,48.6 350.055,48.6 351.155,48.6 352.255,48.6 353.355,48.6 348.955,49.7 350.055,49.7 351.155,49.7 352.255,49.7 353.355,49.7 348.955,50.8 350.055,50.8 351.155,50.8 352.255,50.8 353.355,50.8 348.955,51.9 350.055,51.9 351.155,51.9 352.255,51.9 353.355,51.9 348.955,53 350.055,53 351.155,53 352.255,53 353.355,53
GPS_1PPS: C36.1 R44.1 U4.4
GPS_RESET: R31.2 U4.9
GPS_RF_IN: C34.1 R42.2 U4.11
GPS_RX: R19.2 U4.3
GPS_TX: R20.2 U4.2
GPS_VBAT: BT1.POS C39.2 C40.2 D1.C U4.6
GPS_VDD_RF: R40.2 U4.14
I2C1_SCL: C20.3 C20.42 R17.1 U2.45
I2C1_SDA: C20.4 C20.41 R18.1 U2.46
IMU_nCS: R35.2 U3.22
IMU_SCL: R17.2 R36.2 U3.23 U?.4@331.254,26.076
IMU_SDA: R18.2 R38.2 U3.24 U?.3@331.254,26.726
Lora_CS: R21.2 U?.15
Lora_DIO0: R27.2 U?.5@232.33,33.29
Lora_MISO: R23.2 U?.13
Lora_MOSI: R25.2 U?.14
Lora_RESET: R26.2 U?.4@232.33,35.29
Lora_SCK: R22.2 U?.12
MCU_NRST: C20.21 C22.2 R31.1 R32.2 SW1.1 SW1.4 U2.7
NetC1_1: C1.1 P1.2 R10.1
NetC7_2: C7.2 R11.2 U1.6 U1.7 U1.8
NetC8_4: C8.4 R12.1
NetC18_1: C18.1 R28.1 X1.3
NetC19_2: C19.2 U2.22
NetC26_1: C26.1 U3.10
NetC30_1: C30.1 C31.1 L2.1 R40.1
NetC32_1: C32.1 J2.1 L2.2
NetC32_2: C32.2 C35.1 R42.1
NetC36_3: C36.3 LED3.2 Q2.3
NetC36_4: C36.4 LED3.1 R43.1
NetL1_1: L1.1 U1.2
NetL1_2: L1.2 U1.4
NetLED1_1: LED1.1 R8.1
NetLED2_1: LED2.1 R9.1
NetQ1_1: Q1.1 R3.1 R4.1
NetQ2_1: Q2.1 R44.2
NetR24_1: R24.1 U2.44
NetR33_1: R33.1 U3.11
NetR34_1: R34.1 U3.9
NetR37_1: R37.1 U4.18
NetR39_1: R39.1 U?.2@331.254,27.376
NetR41_1: R41.1 U?.5@329.654,26.076
OSC_IN: C17.1 U2.5 X1.1
OSC_OUT: R28.2 U2.6
PA0: C20.16 U2.10
PA8: C20.17 U2.29
PA10: R26.1 U2.31
PB0: C20.11 U2.18
PB1: C20.12 U2.19
PB2: C20.13 U2.20
PB10: C20.14 R27.1 U2.21
PC13: C20.18 U2.2
PC14: C20.19 U2.3
PC15: C20.20 U2.4
RX1: C20.34 U2.43
RX2_GPSTX: C20.31 R20.1 U2.13
SPI1_CS: R21.1 U2.14
SPI1_MISO: R23.1 U2.16
SPI1_MOSI: R25.1 U2.17
SPI1_SCK: R22.1 U2.15
SPI2_CS: C20.38 U2.25
SPI2_MISO: C20.36 U2.27
SPI2_MOSI: C20.35 U2.28
SPI2_SCK: C20.37 U2.26
SPI3_CS: C20.7 U2.38
SPI3_MISO: C20.10 U2.40
SPI3_MOSI: C20.9 U2.41
SPI3_SCK: C20.8 U2.39
SWCLK: C20.26 U2.37
SWDIO: C20.27 U2.34
TX1: C20.33 U2.42
TX2_GPSRX: C20.30 R19.1 U2.12
USB_DN: R6.1 U2.32
USB_DP: R5.1 U2.33
USB_VBUS: R30.1 U2.30
V_BAT_ADC: C8.8 C10.2 R14.1 R16.2 R29.2
V_BUS_SENSE: C8.9 C9.2 R13.1 R15.2 R30.2
V_PWR: C2.2 C3.2 C4.2 DIO1.2 Q1.3 R7.2 R11.1 U1.5
VBAT: C1.2 C8.10 Q1.2 R7.1 R10.2 R14.2
VBUS: C8.1 DIO1.1 J1.A4_B9 J1.B4_A9 R3.2 R9.2 R13.2
pads on no net: J1. J1.A8 J1.B8 P1.P1 P1.P2 U1.12 U1.13 U1.14 U1.15 U3.2 U3.3 U3.4 U3.5 U3.6 U3.7 U3.12 U3.14 U3.15 U3.16 U3.17 U3.19 U3.21 U4.5 U4.7 U4.13 U4.15 U4.16 U4.17 U4.19 U4.20 U4.21 U4.22 U4.23 U4.24 U4.25 U4.26 U4.27 U4.28 U?.6@232.33,31.29 U?.7@232.33,29.29 U?.8@232.33,27.29 U?.10 U?.11